# Altium PCB PCB_main.PcbDoc
Units mm, origin at the board's own origin, x right, y up, seen from the top; angles counter-clockwise.
Board outline 48 x 35 mm, 2 copper layers (Top Layer, Bottom Layer); 39 components, 18 nets, 112 pads, 66 vias.
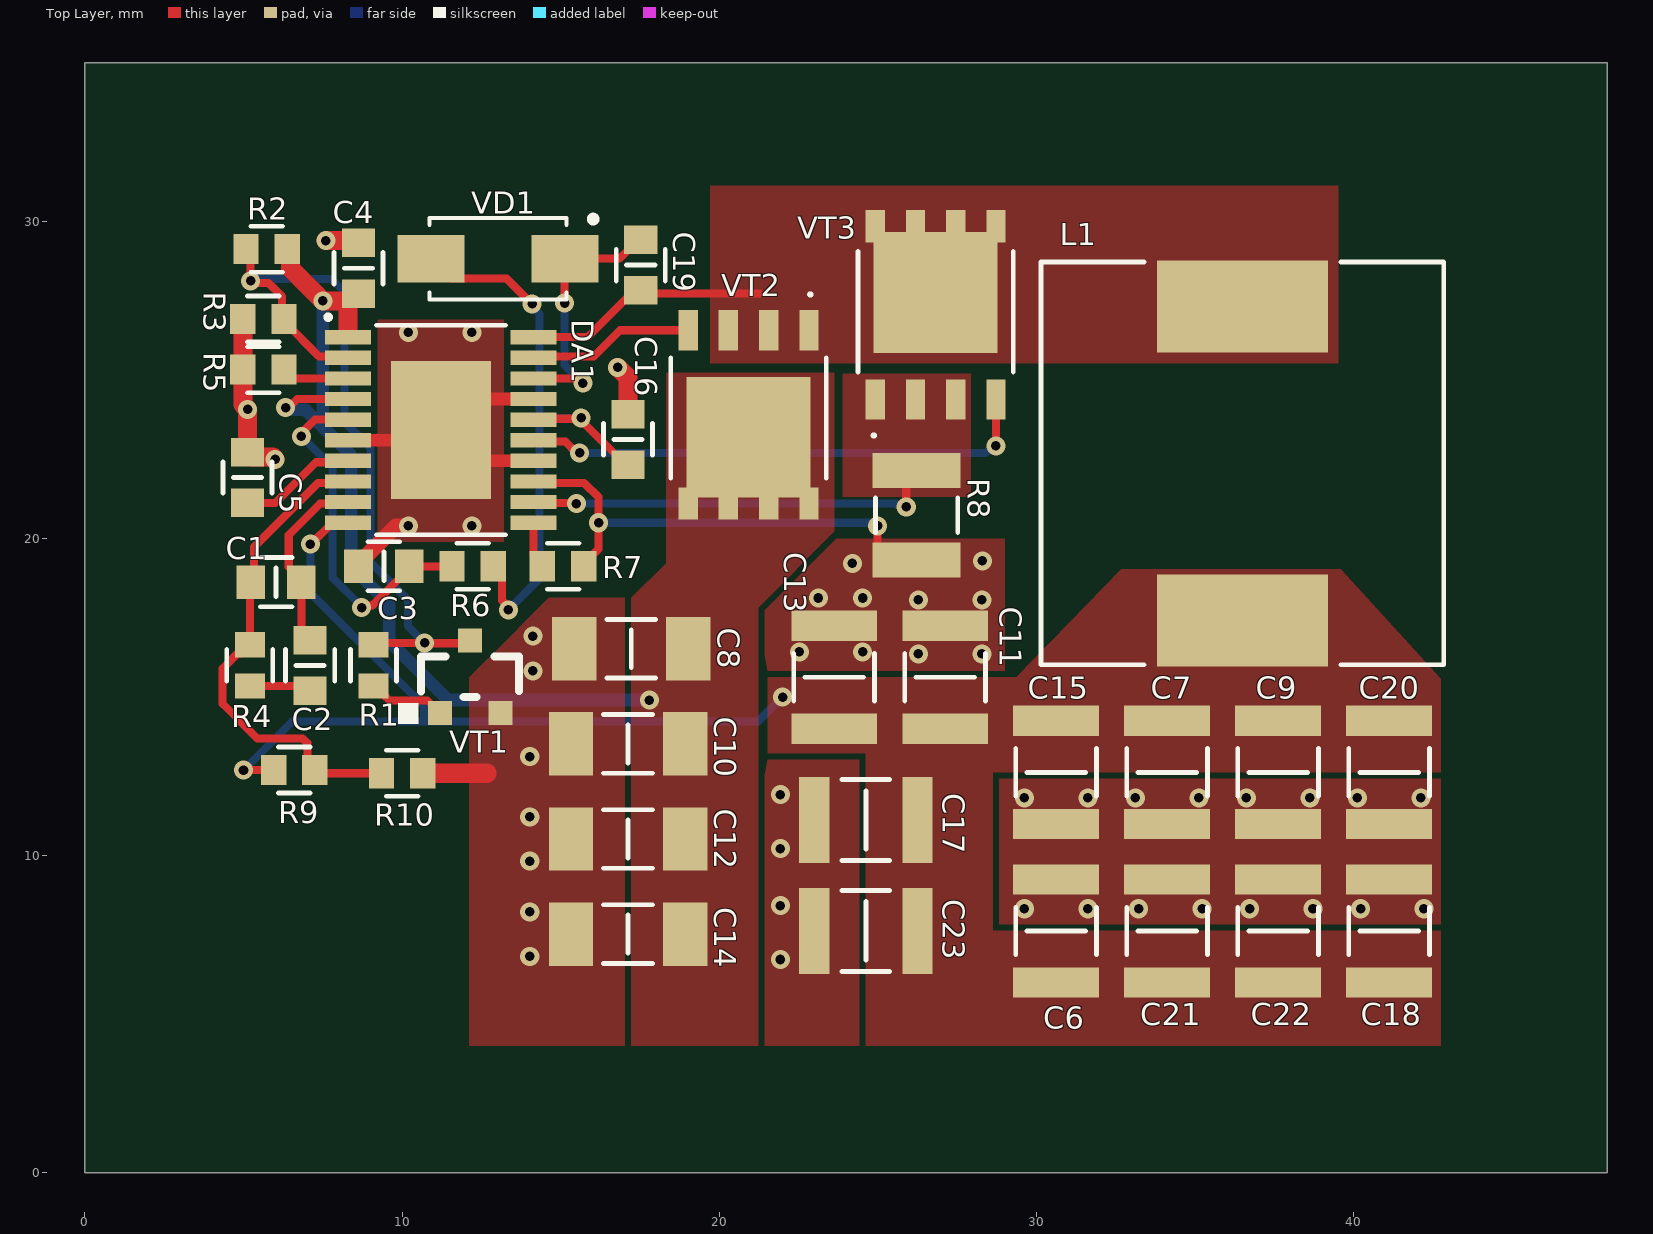
[diagram p0: Top Layer view]
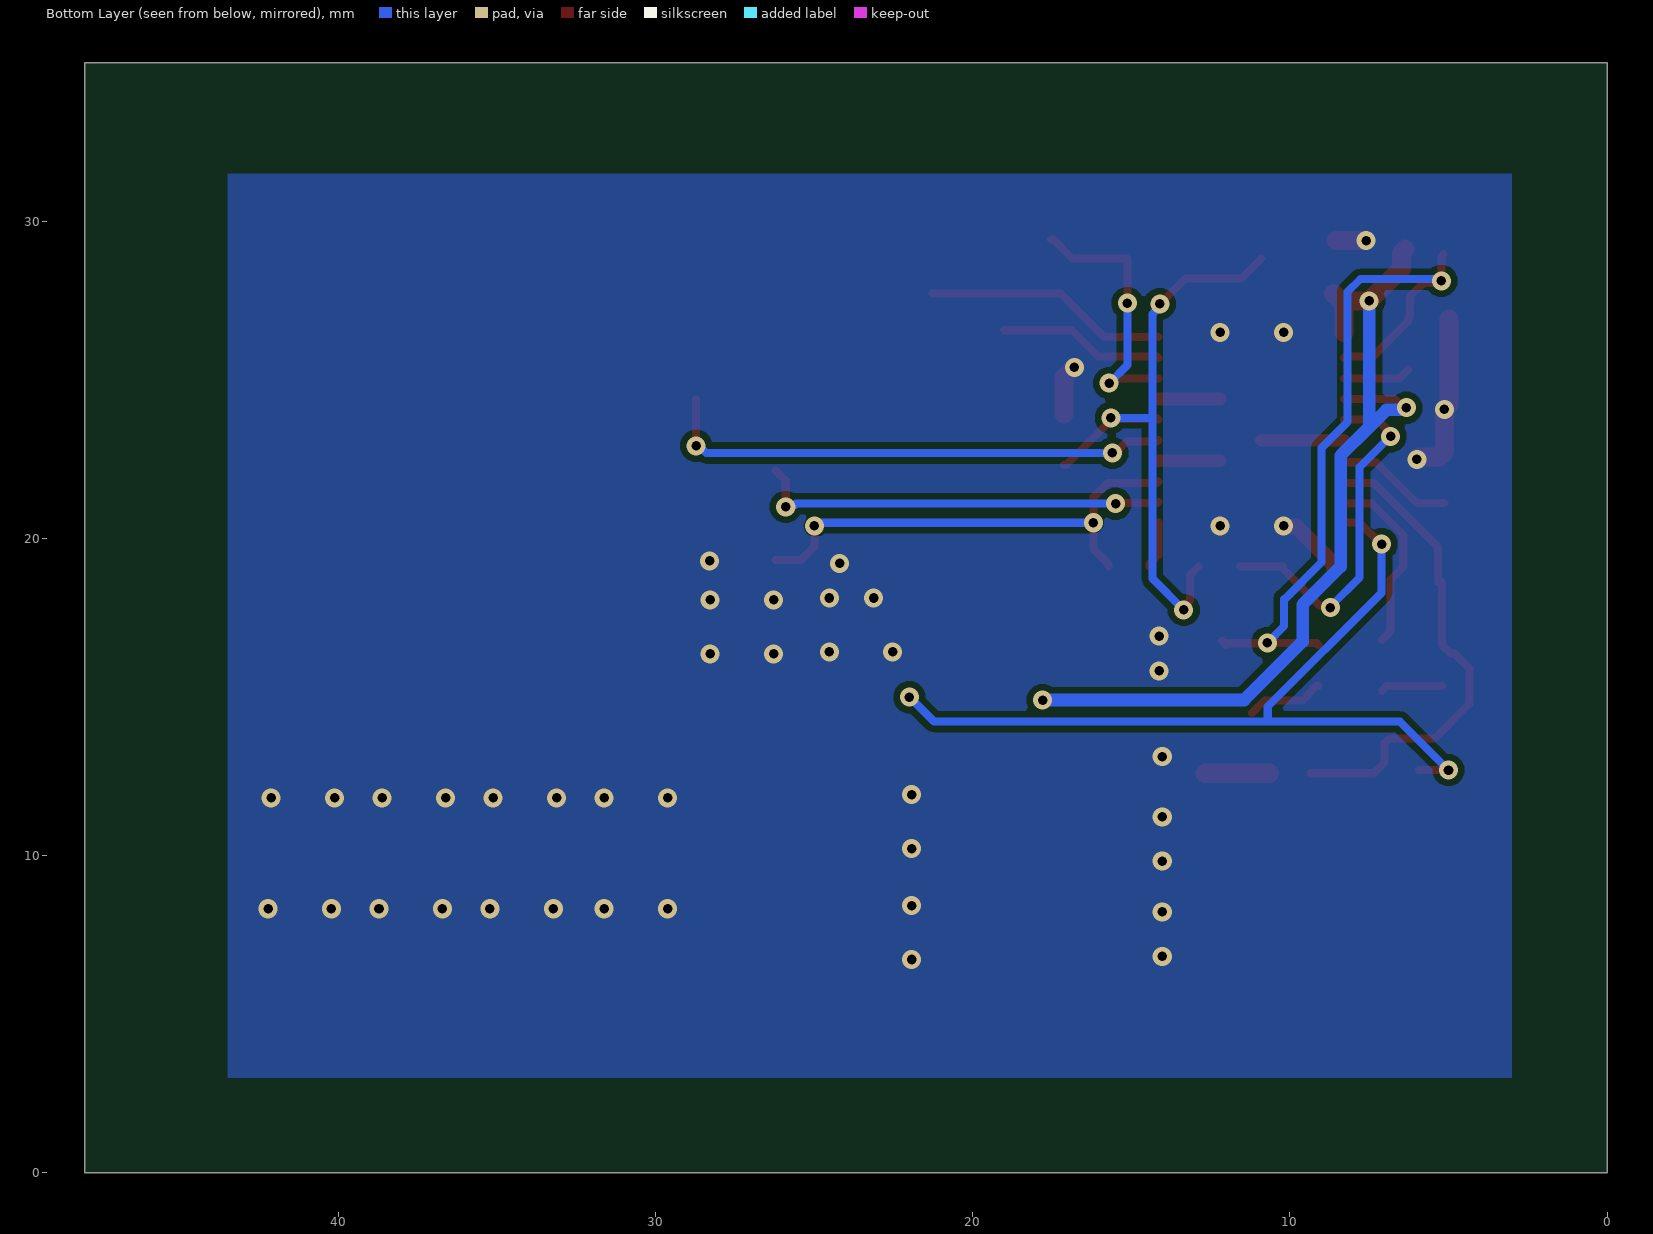
[diagram p1: Bottom Layer view, seen from below]
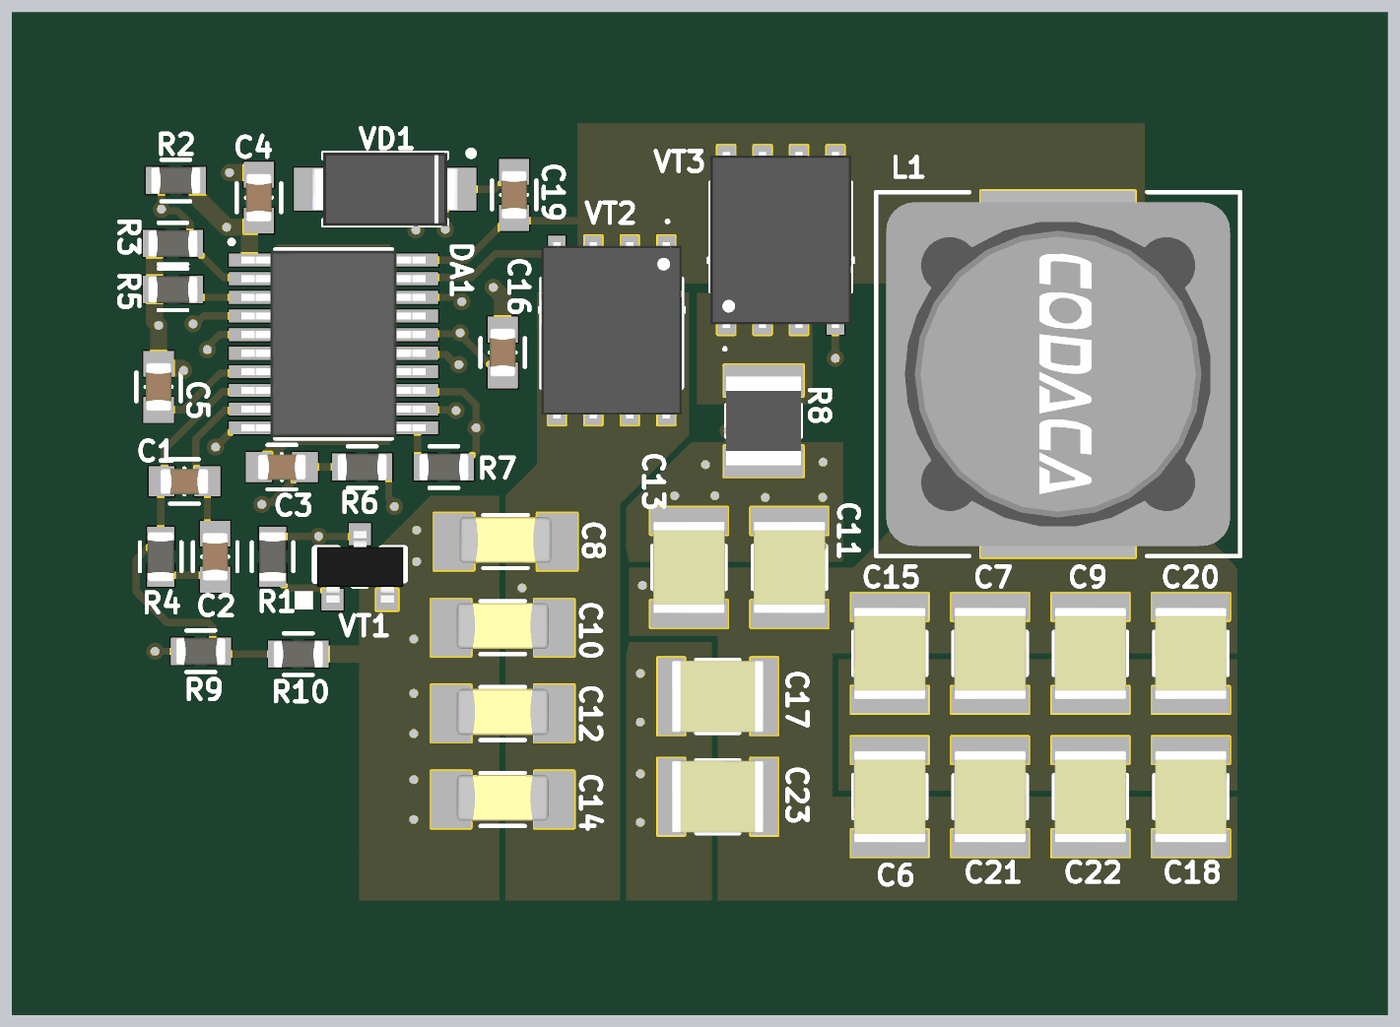
[diagram p2: 3D render of the assembled board from above, using the file's embedded part models]

## Layer stack, top to bottom
Top Solder: solder mask 0.0102, Solder Resist, Dk 3.5
Top Layer: signal copper 0.0356
Dielectric 1: dielectric 0.32, FR-4, Dk 4.8
Bottom Layer: signal copper 0.0356
Bottom Solder: solder mask 0.0102, Solder Resist, Dk 3.5

## Board outline
0,0 0,35 48,35 48,0

## Design rules (kind name [scope] priority, off if disabled: settings)
AcuteAngle [All] p1: minimum=3.50000000000000E+0001 checktracksonly=FALSE
BoardOutlineClearance "BoardOutlineClearance 1" [All] p1: gap=0.25 ignorepadtopadclearanceinfootprint=FALSE except(0: Arc-SplitContinuation Track-SplitContinuation SMDPad-SplitContinuation THPad-SplitContinuation Via-SplitContinuation Fill-SplitContinuation Poly-SplitContinuation Region-SplitContinuation Text-SplitContinuation) // Milling
BoardOutlineClearance "BoardOutlineClearance 2" [All] p2: gap=0.4 ignorepadtopadclearanceinfootprint=FALSE except(0: Arc-SplitContinuation Track-SplitContinuation SMDPad-SplitContinuation THPad-SplitContinuation Via-SplitContinuation Fill-SplitContinuation Poly-SplitContinuation Region-SplitContinuation Text-SplitContinuation) // V-Cut
Clearance "Clearance-1 1/2 Oz" [All] p1: gap=0.125 ignorepadtopadclearanceinfootprint=FALSE except(0.2: Arc-Fill Arc-Poly Track-Fill Track-Poly SMDPad-SMDPad SMDPad-Fill SMDPad-Poly THPad-Fill THPad-Poly Via-Fill Via-Poly Fill-Fill Fill-Poly Poly-Poly Poly-Region Poly-Text; 0.25: Arc-Hole Track-Hole SMDPad-Hole THPad-Hole Via-Hole Fill-Hole Poly-Hole Region-Hole Text-Hole) // Standart
Clearance "Clearance-2 1/2 Oz" [All] p2: gap=0.1 ignorepadtopadclearanceinfootprint=FALSE except(0.15: Arc-Fill Arc-Poly Track-Fill Track-Poly SMDPad-SMDPad SMDPad-Fill SMDPad-Poly THPad-Fill THPad-Poly Via-Fill Via-Poly Fill-Fill Fill-Poly Poly-Poly Poly-Region Poly-Text; 0.25: Arc-Hole Track-Hole SMDPad-Hole THPad-Hole Via-Hole Fill-Hole Poly-Hole Region-Hole Text-Hole) // Advance
DiffPairsRouting DiffPairsRouting_PCIe [InDifferentialPairClass('PCIe')] p1: maxlimit=0.101 minlimit=0.101 mostfreqgap=0.101 toplayer_minwidth=0.1 toplayer_maxwidth=0.1 toplayer_prefwidth=0.1 bottomlayer_minwidth=0.1 bottomlayer_maxwidth=0.1 bottomlayer_prefwidth=0.1 impedanceprofiledriven=TRUE impedanceprofileid={E27F7E04-DA22-4BD8-B395-67B9CAAEB593} maxuncoupledlength=12.7
DiffPairsRouting DiffPairsRouting_USB [InDifferentialPairClass('USB3.0')] p2: maxlimit=0.127 minlimit=0.127 mostfreqgap=0.127 toplayer_minwidth=0.18 toplayer_maxwidth=0.18 toplayer_prefwidth=0.18 bottomlayer_minwidth=0.18 bottomlayer_maxwidth=0.18 bottomlayer_prefwidth=0.18 impedanceprofiledriven=TRUE impedanceprofileid={974B2C30-D13C-404B-80F3-30DCBE79ECB5} maxuncoupledlength=12.7
DiffPairsRouting "DiffPairsRouting 1/2 Oz" [All] p3 off: maxlimit=0.254 minlimit=0.1 mostfreqgap=0.254 toplayer_minwidth=0.1 toplayer_maxwidth=0.381 toplayer_prefwidth=0.381 bottomlayer_minwidth=0.1 bottomlayer_maxwidth=0.381 bottomlayer_prefwidth=0.381 maxuncoupledlength=12.7
HoleSize "Minimum HoleSize" [IsPad] p1: absolutevalues=TRUE maxlimit=5.9 minlimit=0.6 maxpercent=80.000 minpercent=20.000
HoleSize "Minimum HoleSize VIA 1" [IsVia] p2: absolutevalues=TRUE maxlimit=5.9 minlimit=0.3 maxpercent=80.000 minpercent=20.000 // Standart
HoleSize "Minimum HoleSize VIA 2" [IsVia] p3: absolutevalues=TRUE maxlimit=5.9 minlimit=0.2 maxpercent=80.000 minpercent=20.000 // Advance
HoleToHoleClearance Hole2HoleClearance [All] p1: gap=0.25 allowstackedmicrovias=FALSE
Length [InNetClass('USB3.0')] p1: maxlimit=65 minlimit=0
MatchedLengths [All] p1: tolerance=0.05 checknetsindiffpair=TRUE checkdiffpairvsdiffpair=FALSE checkxsignals=FALSE checkothers=FALSE
MinimumAnnularRing "Minimum AR VIA Standart" [All] p1: minimumring=0.15
MinimumAnnularRing "Minimum AR PAD Standart" [All] p2: minimumring=0.2
MinimumAnnularRing "Minimum AR VIA Advance" [All] p3: minimumring=0.1
MinimumAnnularRing "Minimum AR PAD Advance" [All] p4: minimumring=0.15
MinimumSolderMaskSliver "SolderMask Bridge Standart" [All] p1: minsoldermaskwidth=0.15 // All Masks
MinimumSolderMaskSliver "SolderMask Bridge Advance" [All] p2: minsoldermaskwidth=0.1 // Mask LDI
PlaneClearance "PlaneClearance-1 1/2 Oz" [All] p1: clearance=0.2 // Standart
PlaneClearance "PlaneClearance-2 1/2 Oz" [All] p2: clearance=0.15 // Advance
PlaneConnect "TermalConnect-1 1/2 Oz" [All] p1: planeconnectstyle=Relief reliefexpansion=0.2 reliefentries=4 reliefconductorwidth=0.2 reliefairgap=0.2 // Standart
PlaneConnect "TermalConnect-2 1/2 Oz" [All] p2: pad.planeconnectstyle=Relief pad.reliefexpansion=0.15 pad.reliefentries=4 pad.reliefconductorwidth=0.15 pad.reliefairgap=0.15 via.planeconnectstyle=Direct via.reliefexpansion=0.15 via.reliefentries=4 via.reliefconductorwidth=0.15 via.reliefairgap=0.15 // Advance
PolygonConnect PolygonConnect_main [All] p1: connectstyle=Direct reliefconductorwidth=0.254 reliefentries=4 polygonreliefangle="90 Angle" airgapwidth=0.254
PolygonConnect "PolygonConnect-1 1/2 Oz" [All] p2: thpad.connectstyle=Relief thpad.reliefconductorwidth=0.15 thpad.reliefentries=4 thpad.polygonreliefangle="90 Angle" thpad.airgapwidth=0.2 smdpad.connectstyle=Relief smdpad.reliefconductorwidth=0.2 smdpad.reliefentries=4 smdpad.polygonreliefangle="90 Angle" smdpad.airgapwidth=0.2 via.connectstyle=Direct via.reliefconductorwidth=0.254 via.reliefentries=4 via.polygonreliefangle="90 Angle" via.airgapwidth=0.254 // Standart
PolygonConnect "PolygonConnect-2 1/2 Oz" [All] p3: thpad.connectstyle=Relief thpad.reliefconductorwidth=0.125 thpad.reliefentries=4 thpad.polygonreliefangle="90 Angle" thpad.airgapwidth=0.15 smdpad.connectstyle=Relief smdpad.reliefconductorwidth=0.125 smdpad.reliefentries=4 smdpad.polygonreliefangle="90 Angle" smdpad.airgapwidth=0.15 via.connectstyle=Direct via.reliefconductorwidth=0.254 via.reliefentries=4 via.polygonreliefangle="90 Angle" via.airgapwidth=0.254 // Advance
RoutingCorners [All] p1 off: cornerstyle=45-Degree minsetback=2.54 maxsetback=2.54
RoutingVias [All] p1: holewidth=0.3 width=0.6 viastyle="Through Hole" minholewidth=0.2 minwidth=0.4 maxholewidth=5.9 maxwidth=6.4
SilkToSilkClearance Silk2SilkClearance [All] p1 off: silktosilkclearance=0.15
SilkToSolderMaskClearance Silk2SolderMaskClearance [IsPad] p1 off: minsilkscreentomaskgap=0.15 clearancetoexposedcopper=TRUE
SolderMaskExpansion SolderMaskExpansion_vias [IsVia] p1: expansion=0.102 istentingtop=TRUE
SolderMaskExpansion SolderMaskExpansion-1 [All] p2: expansion=0.05 istentingtop=FALSE // Standart
SolderMaskExpansion "SolderMaskExpansion LDI" [All] p3: expansion=0.025 istentingtop=FALSE // Advance
UnRoutedNet [All] p1: checkbadconnections=TRUE
Width "Width 1/2 Oz" [All] p1: maxlimit=10 minlimit=0.1 preferedwidth=0.125 checkconnectedcopper=TRUE
20 further rules are at their usual default settings.

## Components (designator, comment, footprint, x,y, rotation, side; value= is the part's Value field where it differs from the comment)
C1 "Capacitor" 0603C 6.027,18.627 r180 top value="0,01 н"
C2 "Capacitor" 0603C 7.1,16 r270 top value="0,15 н"
C3 "Capacitor" 0603C 9.427,19.127 r0 top value="0,75 н"
C4 "Capacitor" 0603C 8.627,28.527 r270 top value="0,1 мк"
C5 "Capacitor" 0603C 5.127,21.927 r270 top value="10 н"
C6 "Capacitor" 1210C 30.627,7.627 r270 top value="22 мк"
C7 "Capacitor" 1210C 34.127,12.627 r90 top value="22 мк"
C8 "Capacitor" 1206C 17.227,16.527 r0 top value="2,2 мк"
C9 "Capacitor" 1210C 37.627,12.627 r90 top value="22 мк"
C10 "Capacitor" 1206C 17.127,13.527 r0 top value="2,2 мк"
C11 "Capacitor" 1210C 27.127,15.627 r270 top value="22 мк"
C12 "Capacitor" 1206C 17.127,10.527 r0 top value="2,2 мк"
C13 "Capacitor" 1210C 23.627,15.627 r270 top value="22 мк"
C14 "Capacitor" 1206C 17.127,7.527 r0 top value="2,2 мк"
C15 "Capacitor" 1210C 30.627,12.627 r90 top value="22 мк"
C16 "Capacitor" 0603C 17.127,23.127 r90 top value="1 мк"
C17 "Capacitor" 1210C 24.627,11.127 r0 top value="22 мк"
C18 "Capacitor" 1210C 41.127,7.627 r270 top value="22 мк"
C19 "Capacitor" 0603C 17.527,28.627 r270 top value="1 мк"
C20 "Capacitor" 1210C 41.127,12.627 r90 top value="22 мк"
C21 "Capacitor" 1210C 34.127,7.627 r270 top value="22 мк"
C22 "Capacitor" 1210C 37.627,7.627 r270 top value="22 мк"
C23 "Capacitor" 1210C 24.627,7.627 r0 top value="22 мк"
DA1 "LM5116MH" HTSSOP-20 11.227,23.427 r0 top
L1 "CDSPRH127-150M" SPRH127 36.627,22.627 r270 top value="15 мк"
R1 "Resistor" 0603R 9.1,16 r90 top value=N/A
R2 "Resistor" 0603R 5.727,29.127 r0 top value="33 к"
R3 "Resistor" 0603R 5.627,26.927 r0 top value="2,7 к"
R4 "Resistor" 0603R 5.2,16 r90 top value="180 к"
R5 "Resistor" 0603R 5.627,25.327 r0 top value="12,4 к"
R6 "Resistor" 0603R 12.227,19.127 r180 top value="470 к"
R7 "Resistor" 0603R 15.077,19.127 r0 top value="10 к"
R8 "Resistor" 1210R 26.227,20.74 r90 top value="10 м"
R9 "Resistor" 0603R 6.6,12.7 r180 top value="10,7 к"
R10 "Resistor" 0603R 10,12.6 r180 top value="1,21 к"
VD1 "ES1D-E3/61T" SMA 13.027,28.827 r180 top
VT1 "PDTC114ET" SOT23-3 11.195,14.5 r90 top
VT2 "SIR426DP-T1-GE3" PowerPAK_SO-8 20.927,24.027 r270 top
VT3 "SIR426DP-T1-GE3" PowerPAK_SO-8 26.827,26.927 r90 top

## Footprints (in the part's own frame and the unit in brackets; to place one, negate y for a bottom-side part, rotate by r counter-clockwise, add the part's x,y. Pads: shape width x height; smd on the part's side, far side on the other; paste and mask are expansions set on the pad)
0603C [mm] "Chip Resistor, 2-Leads, Body 1,40x0,80mm, IPC Medium Density"
  rect 0.9x1.05 smd: 1(-0.8,0) 2(0.8,0)
  silkscreen extent -0.5,-0.77 0.5,0.77, body extent -0.85,-0.45 0.85,0.45, height 0.9
0603R [mm] "Chip Resistor, 2-Leads, Body 1.60x0.85mm, IPC Medium Density"
  rect 0.8x0.95 smd: 1(-0.65,0) 2(0.65,0)
  silkscreen extent -0.5,-0.72 0.5,0.72, body extent -0.87,-0.47 0.88,0.48, height 0.9
1206C [mm]
  rect 1.4x2 smd paste+0: 1(-1.8,0) 2(1.8,0)
  silkscreen extent -0.77,-0.92 0.77,0.92, body extent -1.6,-0.74 1.6,0.86, height 1.59
1210C [mm]
  rect 0.954x2.706 smd paste+0: 1(-1.625,0) 2(1.625,0)
  silkscreen extent -0.75,-1.28 0.75,1.28, body extent -2.35,-1.6 2.35,1.6, height 0.25
1210R [mm]
  rect 1.1x2.77 smd: 1(-1.413,0) 2(1.413,0)
  silkscreen extent -0.55,-1.3 0.55,1.3, body extent -1.55,-1.3 1.55,1.3, height 0.65
HTSSOP-20 [mm]
  rect 1.45x0.45 smd mask+0.051: 1(-2.925,2.925) 2(-2.925,2.275) 3(-2.925,1.625) 4(-2.925,0.975) 5(-2.925,0.325) 6(-2.925,-0.325) 7(-2.925,-0.975) 8(-2.925,-1.625) 9(-2.925,-2.275) 10(-2.925,-2.925) 11(2.925,-2.925) 12(2.925,-2.275) 13(2.925,-1.625) 14(2.925,-0.975) 15(2.925,-0.325) 16(2.925,0.325) 17(2.925,0.975) 18(2.925,1.625) 19(2.925,2.275) 20(2.925,2.925)
  rect 3.15x4.35 smd: 21(0,0)
  silkscreen extent -3.61,-3.3 2.03,3.61, body extent -3.21,-3.25 3.21,3.25, height 1
PowerPAK_SO-8 [mm]
  rect 1.27x0.61 smd: 1(-2.543,1.905) 2(-2.543,0.635) 3(-2.543,-0.635) 4(-2.543,-1.905)
  rect 1.02x0.61 smd: 5(2.921,-1.905) 8(2.921,1.905)
  rect 0.71x0.61 smd: 6(3.077,-0.635) 7(3.077,0.635)
  rect 3.81x3.91 smd: 9(0.83,0)
  silkscreen extent -3.72,-2.45 2.13,2.45, body extent -2.95,-2.58 3.2,2.58, height 1.12
SMA [mm]
  rect 2.12x1.5 smd: 1(2.115,0) 2(-2.115,0)
  silkscreen extent -3.1,-1.35 2.16,1.28, body extent -2.57,-1.28 2.57,1.28, height 2.5
SOT23-3 [mil]
  rect 30x30 smd: 1(0,0) 2(0,-75) 3(90,-37.5)
  silkscreen extent -13,-98 70,52, body extent -4,-97 94,21, height 41
SPRH127 [mm]
  rect 2.9x5.4 smd: 1(-4.696,-0.127) 2(5.204,-0.127)
  silkscreen extent -6.1,-6.48 6.6,6.22, body extent -5.75,-6.13 6.25,5.87, height 8.05

## Part data
C1: library part Capacitor_0,01n_10_50V_X7R_0603C, "Конденсатор", Capacity (nF)=0,01, Dielectric=X7R, Tolerance=0,1, Voltage (V)=50, Library Path2=Schematic\Capacitor.SchLib, Part Number=Capacitor_0,01n_10_50V_X7R_0603C
C2: library part Capacitor_0,15n_10_50V_X7R_0603C, "Конденсатор", Capacity (nF)=0,15, Dielectric=X7R, Tolerance=0,1, Voltage (V)=50, Library Path2=Schematic\Capacitor.SchLib, Part Number=Capacitor_0,15n_10_50V_X7R_0603C
C3: library part Capacitor_0,75n_10_50V_X7R_0603C, "Конденсатор", Capacity (nF)=0,75, Dielectric=X7R, Tolerance=0,1, Voltage (V)=50, Library Path2=Schematic\Capacitor.SchLib, Part Number=Capacitor_0,75n_10_50V_X7R_0603C
C4: library part Capacitor_0,1u_10_50V_X7R_0603C, "Конденсатор", Capacity (nF)=100, Dielectric=X7R, Tolerance=0,1, Voltage (V)=50, Library Path2=Schematic\Capacitor.SchLib, Part Number=Capacitor_0,1u_10_50V_X7R_0603C
C5: library part Capacitor_10n_10_50V_X7R_0603C, "Конденсатор", Capacity (nF)=10, Dielectric=X7R, Tolerance=0,1, Voltage (V)=50, Library Path2=Schematic\Capacitor.SchLib, Part Number=Capacitor_10n_10_50V_X7R_0603C
C6 C7 C9 C11 C13 C15 C17 C18 C20 C21 C22 C23: library part Capacitor_22u_10_25V_X7R_1210C, "Конденсатор", Capacity (nF)=22000, Dielectric=X7R, Tolerance=0,1, Voltage (V)=25, Library Path2=Schematic\Capacitor.SchLib, Part Number=Capacitor_22u_10_25V_X7R_1210C
C8 C10 C12 C14: library part Capacitor_2,2u_10_50V_X7R_1206C, "Конденсатор", Capacity (nF)=2200, Dielectric=X7R, Tolerance=0,1, Voltage (V)=50, Library Path2=Schematic\Capacitor.SchLib, Part Number=Capacitor_2,2u_10_50V_X7R_1206C
C16 C19: library part Capacitor_1u_10_50V_X7R_0603C, "Конденсатор", Capacity (nF)=1000, Dielectric=X7R, Tolerance=0,1, Voltage (V)=50, Library Path2=Schematic\Capacitor.SchLib, Part Number=Capacitor_1u_10_50V_X7R_0603C
DA1: "dc-dc понижающий adj 6-100v", Manufacturer_Part_Number=LM5116MH/NOPB, Part Number=LM5116MH
L1: "Индуктивность на 15 мкГн, номинальный ток 8,4 А", Current (A)=8,4, Inductance (μH)=15, Part Number=CDSPRH127-150M
R1: library part res_0603_N/A, "посадочное место 0603 под перемычку", Tolerance=1%, Part Number=res_0603_N/A
R2: library part Resistor_33k_1_0603, "Резистор номиналом 33 кОм и точностью 1%", Tolerance=1%, Part Number=Resistor_33k_1_0603
R3: library part Resistor_2.7k_1_0603, "Резистор номиналом 2,7 кОм и точностью 1%", Tolerance=1%, Part Number=Resistor_2.7k_1_0603
R4: library part Resistor_180k_1_0603, "Резистор номиналом 180 кОм и точностью 1%", Tolerance=1%, Part Number=Resistor_180k_1_0603
R5: library part Resistor_12.4k_1_0603, "Резистор номиналом 12,4 кОм и точностью 1%", Tolerance=1%, Part Number=Resistor_12.4k_1_0603
R6: library part Resistor_470k_1_0603, "Резистор номиналом 470 кОм и точностью 1%", Tolerance=1%, Part Number=Resistor_470k_1_0603
R7: library part Resistor_10k_1_0603, "Резистор номиналом 10 кОм и точностью 1%", Tolerance=1%, Part Number=Resistor_10k_1_0603
R8: library part RL1210FR-070R01L, "Резистор номиналом 10 мОм, точностью 1%, 0.5Вт", Tolerance=1%, Part Number=RL1210FR-070R01L
R9: library part Resistor_10.7k_1_0603, "Резистор номиналом 10,7 кОм и точностью 1%", Tolerance=1%, Part Number=Resistor_10.7k_1_0603
R10: library part Resistor_1.21k_1_0603, "Резистор номиналом 1,21 кОм и точностью 1%", Tolerance=1%, Part Number=Resistor_1.21k_1_0603
VD1: "Диод 1A 200V", Current (A)=1, Repetitive peak reverse voltage (Vrrm)=200, Part Number=ES1D-E3/61T
VT1: "цифровой npn 50в 100мА", Part Number=PDTC114ET, Напряжение С-И/К-Э="50 В", Ток макс#="0, 1 А"
VT2 VT3: "Транзистор полевой MOSFET N-канальный 40В 41.7Вт", Part Number=SIR426DP-T1-GE3, Напряжение С-И/К-Э="40 В"

## Via types
v1: diameter 0.6, hole 0.3, Top Layer to Bottom Layer, tented both sides, 66 vias

## Nets (pads, with @x,y where several pads share a name; then routed paths per layer and width w, separated by ;. In a path a pad name is that pad's centre, name@x,y a point inside that pad or via, vN(x,y) a via of type N, cw(c..) or ccw(c..) an arc to the next point about the centre after c; other vN are vias at no path point)
COMP: C1.1 C2.1 DA1.9 | length 5.9
  Top Layer w0.254: C2.1 6.827,17.073 C1.1 6.827,18.702 6.427,19.102 6.427,20.116 7.419,21.108 8.258,21.108 DA1.9
control: R1.1 VT1.1 | length 2.5
  Top Layer w0.254: R1.1 9.175,15.35 9.448,15.077 9.448,15.049 9.597,14.9 10.795,14.9 VT1.1
CS: DA1.12 R8.2 VT3.1 VT3.2 VT3.3 | length 13.1
  Top Layer w0.254: DA1.12 14.178,21.126 15.474,21.126 v1(15.5,21.1) ; v1(25.9,21) 25.9,21.826 R8.2
  Bottom Layer w0.254: v1(15.5,21.1) 25.578,21.1 25.612,21.066 25.834,21.066 v1(25.9,21)
DEMB: DA1.11 R7.1 | length 1.5
  Top Layer w0.254: DA1.11 14.152,19.477 14.427,19.202 R7.1
FB: C1.2 DA1.8 R4.2 R9.1 R10.2 | length 15.5
  Top Layer w0.254: C1.2 5.2,18.6 R4.2 4.927,16.377 4.813,16.377 4.344,15.908 4.344,14.792 5.436,13.7 6.864,13.7 7.012,13.551 7.012,12.938 R9.1 7.35,12.6 R10.2 ; C1.2@5.33,18.63 5.33,19.737 7.351,21.758 8.258,21.758 DA1.8
GND: C3.1 C4.1 C5.1 C6.1 C7.1 C8.1 C9.1 C10.1 C11.1 C12.1 C13.1 C14.1 C15.1 C16.2 C17.1 C18.1 C20.1 C21.1 C22.1 C23.1 DA1.6 DA1.13 DA1.14 DA1.17 DA1.21 R3.1 R5.1 R7.2 R8.1 R10.1 VT1.2 | length 34.1
  Top Layer w0.254: C4.1@8.554,29.4 C4.1 ; DA1.13 14.196,21.758 15.742,21.758 16.192,21.308 16.192,20.508 v1(16.2,20.5) 16.2,19.675 15.727,19.202 R7.2 ; v1(25,20.4) 25,19.75 25.423,19.327 R8.1
  Top Layer w0.4: DA1.6 DA1.21@10.902,23.102 ; DA1.21@12.202,22.452 DA1.14 ; DA1.21@12.202,24.402 DA1.17
  Top Layer w0.5: C3.1 8.627,19.202 9.806,20.381 10.181,20.381 v1(10.2,20.4)
  Top Layer w0.6: R3.1 R5.1 4.977,24.223 v1(5.127,24.073) C5.1 5.277,22.577 5.923,22.577 v1(6,22.5) ; v1(7.6,29.4) C4.1@8.554,29.4 ; R10.1 12.675,12.6 ; v1(16.8,25.4) 17.127,25.073 C16.2
  Bottom Layer w0.254: v1(16.2,20.5) 24.806,20.5 24.906,20.4 v1(25,20.4)
  other v1: 21.927,6.727 14.027,6.827 14.027,8.227 29.627,8.327 31.627,8.327 33.227,8.327 35.227,8.327 36.727,8.327 38.727,8.327 40.227,8.327 42.227,8.327 21.927,8.427 14.027,9.827 21.927,10.227 14.027,11.227 29.627,11.827 31.627,11.827 33.127,11.827 35.127,11.827 36.627,11.827 38.627,11.827 40.127,11.827 42.127,11.827 21.927,11.927 14.027,13.127 14.127,15.827 26.286,16.368 28.286,16.368 22.527,16.427 24.527,16.427 14.127,16.927 26.286,18.068 28.286,18.068 23.127,18.127 24.527,18.127 24.2,19.219 28.3,19.3 12.2,20.4 10.2,26.5 12.2,26.5
HB: C19.1 DA1.18 VD1.2 | length 8.4
  Top Layer w0.254: DA1.18 15.454,25.052 15.606,24.9 v1(15.7,24.9) ; v1(15.127,27.427) 15.127,28.812 VD1.2 16.852,28.827 17.452,29.427 C19.1
  Bottom Layer w0.254: v1(15.127,27.427) 15.127,25.473 v1(15.7,24.9)
HO: DA1.19 VT2.4 | length 5.2
  Top Layer w0.254: DA1.19 14.196,25.746 16.046,25.746 16.87,26.57 VT2.4
LO: DA1.15 VT3.4 | length 16.3
  Top Layer w0.254: DA1.15 14.196,23.058 15.148,23.058 15.506,22.7 v1(15.6,22.7) ; v1(28.727,22.927) 28.73,22.929 28.73,24.382 VT3.4
  Bottom Layer w0.254: v1(15.6,22.7) 28.406,22.7 28.633,22.927 v1(28.727,22.927)
R4_C2: C2.2 R4.1 | length 2
  Top Layer w0.254: R4.1 6.95,15.35 C2.2
RAMP: C3.2 DA1.5 R6.2 | length 11.4
  Top Layer w0.254: v1(6.827,23.227) 6.893,23.293 6.893,23.393 7.252,23.752 DA1.5 ; v1(8.727,17.827) 8.793,17.893 9.068,17.893 10.227,19.052 C3.2 R6.2
  Bottom Layer w0.254: v1(6.827,23.227) 7.8,22.254 7.8,18.776 8.727,17.849 v1(8.727,17.827)
RT/SYNC: DA1.3 R5.2 | length 2.1
  Top Layer w0.254: R5.2 6.277,25.325 6.55,25.052 DA1.3
SS: C5.2 DA1.7 | length 3.7
  Top Layer w0.254: C5.2 6.001,21.127 7.282,22.408 8.258,22.408 DA1.7
SW: C19.2 DA1.20 L1.1 VT2.1 VT2.2 VT2.3 VT3.5 VT3.6 VT3.7 VT3.8 VT3.9 | length 7.7
  Top Layer w0.254: DA1.20 15.852,26.352 17.227,27.727 21.278,27.727
UVLO: DA1.2 R1.2 R2.1 R3.2 VT1.3 | length 23.8
  Top Layer w0.254: R2.1@5.152,28.977 5.227,28.902 v1(5.227,28.127) 5.293,28.061 5.793,28.061 6.22,27.634 6.22,26.984 R3.2 6.277,26.852 7.383,25.746 8.258,25.746 DA1.2 ; R1.2 9.16,16.71 v1(10.71,16.71) 10.72,16.7 11.962,16.7 12.011,16.65 VT1.3
  Bottom Layer w0.254: v1(5.227,28.127) 5.281,28.181 7.782,28.181 8.181,27.782 8.181,23.673 9,22.854 9,19.254 10.154,18.1 ; 10.181,18.1 10.181,17.239 v1(10.71,16.71)
VCC_16: C16.1 DA1.16 R6.1 VD1.1 | length 20.4
  Top Layer w0.254: VD1.1 11.535,28.204 13.296,28.204 v1(14.1,27.4) ; R6.1 13.15,18.854 13.15,18.044 13.35,17.844 v1(13.35,17.75) ; DA1.16 14.18,23.78 15.619,23.78 v1(15.647,23.807) ; v1@15.715,23.739 15.727,23.727 15.727,23.652 17.052,22.327 C16.1
  Bottom Layer w0.254: v1(13.35,17.75) 14.339,18.739 14.339,23.807 ; v1(14.1,27.4) 14.1,27.317 14.339,27.078 14.339,23.807 ; v1(15.647,23.807) 14.339,23.807
Vin: C4.2 C8.2 C10.2 C12.2 C14.2 DA1.1 DA1.4 R2.2 VT2.5 VT2.6 VT2.7 VT2.8 VT2.9 | length 28.3
  Top Layer w0.254: v1(6.327,24.127) 6.421,24.127 6.696,24.402 DA1.4
  Top Layer w0.6: R2.2 6.477,29.027 6.477,28.523 v1(7.5,27.5) 8.4,27.5 C4.2 ; DA1.1@8.302,26.5 C4.2@8.302,27.404
  Bottom Layer w0.4: v1(6.327,24.127) 6.393,24.061 6.956,24.061 7.5,23.517 ; v1(7.5,27.5) 7.5,23.517 ; v1(17.8,14.908) 11.446,14.908 9.6,16.754 9.6,17.917 8.4,19.117 8.4,22.617 7.5,23.517
Vout: C6.2 C7.2 C9.2 C11.2 C13.2 C15.2 C17.2 C18.2 C20.2 C21.2 C22.2 C23.2 DA1.10 L1.2 R9.2 | length 27.5
  Top Layer w0.254: v1(5,12.7) R9.2 ; v1(7.111,19.827) 7.127,19.827 7.802,20.502 DA1.10
  Bottom Layer w0.254: v1(5,12.7) 5.008,12.7 6.535,14.227 10.7,14.227 ; v1(7.111,19.827) 7.111,18.289 10.7,14.7 10.7,14.227 ; v1(22,15) 21.227,14.227 10.7,14.227

## Polygon pours and split planes (outlines as drawn)
GND on Top Layer "GND_L01_P010" (solid, pour order 10): 29,20 29,15.627 42.75,15.627 42.75,4 12.127,4 12.127,15.627 14.627,18.127 19.627,18.127 19.627,20
SW on Top Layer "SW_L01_P005" (solid, pour order 5): 39.527,25.527 39.527,31.127 19.727,31.127 19.727,25.527
CS on Top Layer "CS_L01_P006" (solid, pour order 6): 23.9,25.2 27.927,25.2 27.927,21.327 23.9,21.327
Vout on Top Layer "VOUT_L01_P007" (solid, pour order 7): 42.75,12.627 28.627,12.627 28.627,12.377 28.627,7.627 42.75,7.627 42.75,4 24.627,4 24.627,13.227 21.527,13.227 21.527,15.627 29.369,15.627 32.684,19.027 39.608,19.027 42.75,15.581
Vin on Top Layer "VIN_L01_P009" (solid, pour order 9): 23.627,25.227 18.327,25.227 18.327,19.227 17.227,18.127 17.227,4 21.227,4 21.227,17.827 23.627,20.227
GND on Top Layer "GND_L01_P011" (solid, pour order 11): 13.2,26.9 13.2,19.9 9.2,19.9 9.2,26.9
GND on Bottom Layer "GND_L02_P003" (solid, pour order 3): 43.5,31.5 43.5,3 3,3 3,31.5

## Silkscreen, mask and mechanical layers (free items; w line width, h text height)
Mechanical 1:
  lines w0.254: 0,0 0,35 48,35 48,0 47,0 0,0